# Altium PCB pay-optical.PcbDoc (part 5 of 6)
Units mm, origin at the board's own origin, x right, y up, seen from the top; angles counter-clockwise.
Board outline 128 x 54 mm, 4 copper layers (Top Layer, GND, VCC, Bottom Layer), stack 0.778 mm thick; 459 components, 246 nets, 1364 pads, 496 vias.
Unrouted connection lines stored in the file: 133.
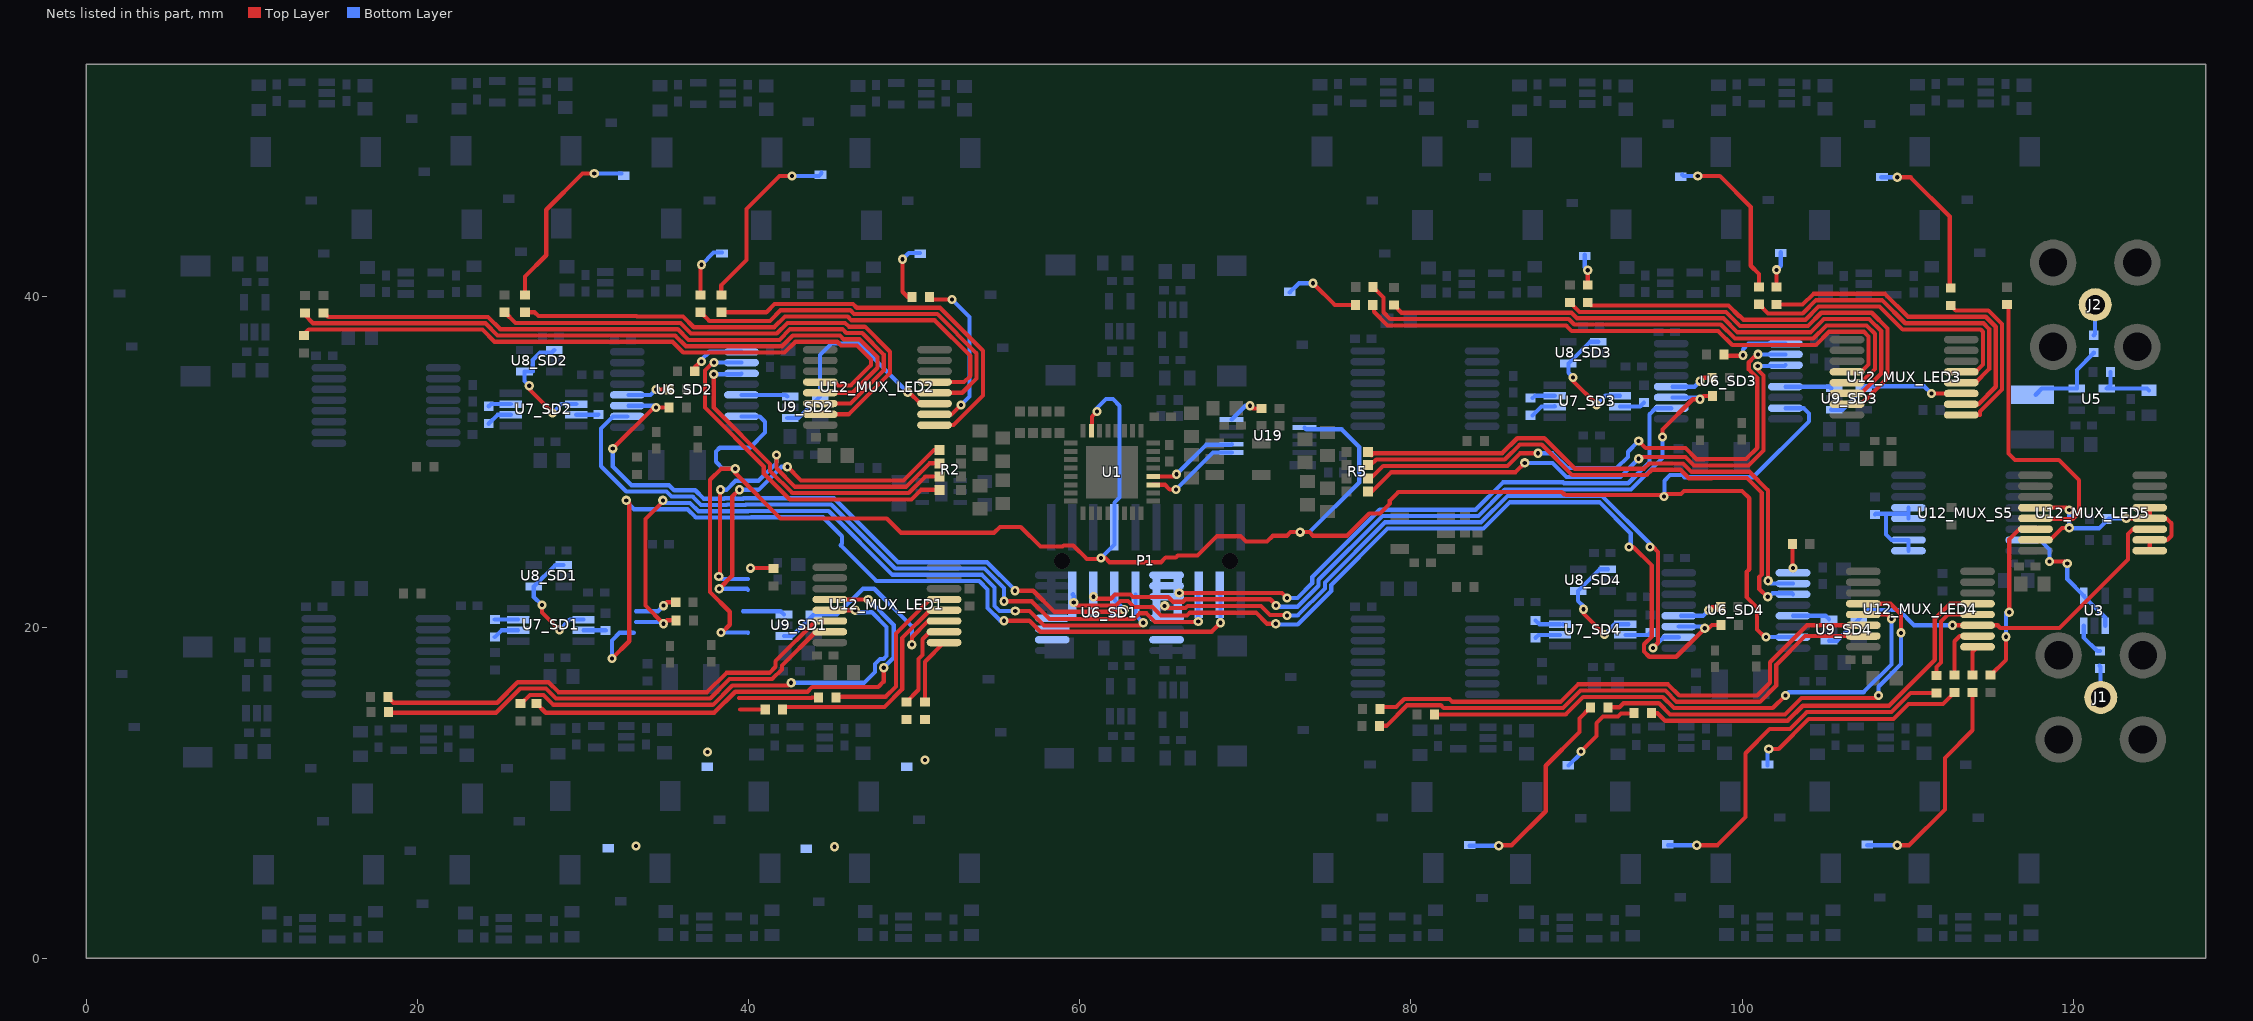
[diagram p6: the nets of this part, all layers, seen from the top]

## Via types
v1: diameter 0.559, hole 0.254, Top Layer to Bottom Layer, 440 vias
v2: diameter 2.362, hole 2.1, Top Layer to Bottom Layer, 34 vias
v3: diameter 1.3, hole 1, Top Layer to Bottom Layer, 14 vias
v4: diameter 6, hole 3.6, Top Layer to Bottom Layer, 8 vias

## Nets (pads, with @x,y where several pads share a name; then routed paths per layer and width w, separated by ;. In a path a pad name is that pad's centre, name@x,y a point inside that pad or via, vN(x,y) a via of type N, cw(c..) or ccw(c..) an arc to the next point about the centre after c; other vN are vias at no path point) (continued)
NetD1_AC43_1: D1_AC43.1 R8_AC43.2 | length 4.7
  Top Layer w0.254: v1(74.085,40.773) 75.404,39.455 R8_AC43.2@76.64,39.455
  Bottom Layer w0.254: D1_AC43.1@72.675,40.209 73.24,40.773 v1(74.085,40.773)
NetD1_AC44_1: D1_AC44.1 R8_AC44.2 | length 12.9
  Top Layer w0.254: v1(85.307,6.797) 85.344,6.834 86.082,6.834 88.138,8.89 88.138,11.633 90.17,13.665 90.17,14.495 R8_AC44.2@90.839,15.164
  Bottom Layer w0.254: D1_AC44.1@83.543,6.797 v1(85.307,6.797)
NetD1_AC51_1: D1_AC51.1 R8_AC51.2
  other v1: 50.648,11.975
NetD1_AC52_1: D1_AC52.1 R8_AC52.2 | length 11.3
  Top Layer w0.254: R8_AC52.2@38.354,40.073 38.354,40.657 39.877,42.18 39.877,45.251 41.875,47.249 v1(42.621,47.249)
  Bottom Layer w0.254: v1(42.621,47.249) 44.247,47.249 44.374,47.376 44.374,47.416 D1_AC52.1@44.399,47.441
NetD1_AC53_1: D1_AC53.1 R8_AC53.2 | length 9.5
  Top Layer w0.254: v1(109.371,47.168) 110.177,47.168 112.535,44.81 112.535,40.543 R8_AC53.2@112.598,40.479
  Bottom Layer w0.254: D1_AC53.1@108.407,47.168 v1(109.371,47.168)
NetD1_AC54_1: D1_AC54.1 R8_AC54.2 | length 13.3
  Top Layer w0.254: v1(109.371,6.834) 110.085,6.834 112.243,8.992 112.243,12.1 113.919,13.776 R8_AC54.2@113.919,16.061
  Bottom Layer w0.254: D1_AC54.1@107.556,6.834 v1(109.371,6.834)
NetD1_AC61_1: D1_AC61.1 R8_AC61.2 | length 4.8
  Top Layer w0.254: 39.421,15.723 43.802,15.723 43.828,15.748 R8_AC61.2@44.23,15.748
  other v1: 33.198,6.782
NetD1_AC62_1: D1_AC62.1 R8_AC62.2 | length 11.1
  Top Layer w0.254: R8_AC62.2@26.492,40.073 26.492,41.18 27.778,42.466 27.778,45.211 29.964,47.396 v1(30.675,47.396)
  Bottom Layer w0.254: v1(30.675,47.396) D1_AC62.1@32.327,47.396
NetD1_AC63_1: D1_AC63.1 R8_AC63.2 | length 1.9
  Top Layer w0.254: R8_AC63.2@90.678,40.657 v1(90.678,41.554)
  Bottom Layer w0.254: D1_AC63.1@90.5,42.494 90.5,41.732 v1(90.678,41.554)
NetD1_AC64_1: D1_AC64.1 R8_AC64.2 | length 5.8
  Top Layer w0.254: v1(90.269,12.497) 91.201,13.429 91.201,14.207 91.599,14.605 92.507,14.605 92.685,14.783 93.455,14.783 R8_AC64.2@93.48,14.808
  Bottom Layer w0.254: D1_AC64.1@89.521,11.643 90.269,12.391 v1(90.269,12.497)
NetD1_AC71_1: D1_AC71.1 R8_AC71.2
  other v1: 45.187,6.743
NetD1_AC72_1: D1_AC72.1 R8_AC72.2 | length 3.9
  Top Layer w0.254: v1(49.295,42.22) 49.295,40.259 49.626,39.929 R8_AC72.2@49.869,39.929
  Bottom Layer w0.254: v1(49.295,42.22) 49.676,42.6 D1_AC72.1@50.356,42.6
NetD1_AC73_1: D1_AC73.1 R8_AC73.2 | length 2.2
  Top Layer w0.254: R8_AC73.2@102.083,40.547 v1(102.083,41.58)
  Bottom Layer w0.254: v1(102.083,41.58) 102.331,41.828 D1_AC73.1@102.331,42.646
NetD1_AC74_1: D1_AC74.1 R8_AC74.2 | length 13.7
  Top Layer w0.254: v1(101.605,12.644) 102.21,12.644 104.018,14.453 109.133,14.453 110.048,15.367 112.133,15.367 R8_AC74.2@112.827,16.061
  Bottom Layer w0.254: D1_AC74.1@101.53,11.657 101.53,12.568 v1(101.605,12.644)
NetD1_AC81_1: D1_AC81.1 R8_AC81.2 | length 1.5
  Top Layer w0.254: 39.497,15.037 R8_AC81.2@41.004,15.037
  other v1: 37.516,12.471
NetD1_AC82_1: D1_AC82.1 R8_AC82.2 | length 3.4
  Top Layer w0.254: R8_AC82.2@37.1,40.073 37.1,41.83 v1(37.154,41.885)
  Bottom Layer w0.254: v1(37.154,41.885) 37.89,42.621 D1_AC82.1@38.393,42.621
NetD1_AC83_1: D1_AC83.1 R8_AC83.2 | length 10
  Top Layer w0.254: v1(97.325,47.243) 98.654,47.243 100.52,45.377 100.52,41.828 101.016,41.332 R8_AC83.2@101.016,40.555
  Bottom Layer w0.254: D1_AC83.1@96.387,47.32 96.463,47.243 v1(97.325,47.243)
NetD1_AC84_1: D1_AC84.1 R8_AC84.2 | length 22.5
  Top Layer w0.254: v1@97.264,6.662 v1(97.264,6.84) 98.508,6.84 100.2,8.531 100.2,12.392 101.663,13.856 102.883,13.856 103.906,14.879 109.021,14.879 110.178,16.036 R8_AC84.2@111.735,16.036
  Bottom Layer w0.254: D1_AC84.1@95.516,6.84 v1(97.264,6.84)
NetJ1_1: J1.1 R36.1 | length 2.3
  Bottom Layer w0.254: J1.1@121.412,16.002 121.648,15.766 121.648,17.611 R36.1@121.59,17.669
NetJ2_1: J2.1 R37.2 | length 1.9
  Bottom Layer w0.254: R37.2@121.234,37.634 121.314,37.714 J2.1@121.314,39.477
NetR2_1: R2.1 U6_SD1.11 | length 22
  Top Layer w0.254: v1(38.227,22.327) 39.014,23.114 39.014,27.889 39.421,28.296 v1(39.446,28.296) ; v1(42.342,29.693) 43.175,28.86 49.358,28.86 51.195,30.697 R2.1@51.522,30.697
  Bottom Layer w0.254: v1(38.227,22.327) 39.906,22.327 39.964,22.268 ; v1(39.446,28.296) 40.589,28.296 41.986,29.693 v1(42.342,29.693)
NetR2_2: R2.2 U6_SD1.10 | length 23.5
  Top Layer w0.254: v1(38.202,23.063) v1@38.278,22.987 ; v1@38.303,22.962 v1@38.278,22.987 ; v1(38.303,28.296) 38.278,28.27 v1@38.278,22.987 ; v1(41.681,30.404) 41.681,29.599 42.801,28.479 49.515,28.479 50.934,29.897 R2.2@51.522,29.897
  Bottom Layer w0.254: v1(38.202,23.063) 38.347,22.918 39.964,22.918 ; v1(38.303,28.296) 38.666,28.296 39.216,28.846 40.6,28.846 41.681,29.927 v1(41.681,30.404)
NetR2_3: R2.3 U6_SD2.11 | length 20.1
  Top Layer w0.254: v1(37.897,35.281) 37.897,33.268 41.3,29.864 41.3,29.441 42.643,28.098 49.673,28.098 50.673,29.097 R2.3@51.522,29.097
  Bottom Layer w0.254: v1(37.897,35.281) 39.524,35.281 U6_SD2.11@39.573,35.33
NetR2_4: R2.4 U6_SD2.10 | length 21.6
  Top Layer w0.254: v1(37.911,35.98) 37.842,35.98 37.363,35.502 37.363,33.263 40.919,29.707 40.919,29.283 42.486,27.717 49.831,27.717 50.412,28.297 R2.4@51.522,28.297
  Bottom Layer w0.254: v1(37.911,35.98) U6_SD2.10@39.573,35.98
NetR5_1: R5.1 U6_SD3.11 | length 33
  Top Layer w0.254: R5.1@77.409,28.188 77.642,28.188 78.816,29.362 86.312,29.362 v1(86.875,29.925) ; v1(93.75,30.175) 93.849,30.274 96.584,30.274 97.095,29.764 97.853,29.764 97.858,29.769 100.389,29.769 101.295,30.676 101.295,35.204 100.937,35.562 v1(100.937,35.778)
  Bottom Layer w0.254: v1(86.875,29.925) 88.55,29.925 89.4,29.075 92.65,29.075 v1(93.75,30.175) ; v1(100.937,35.778) 102.564,35.778 U6_SD3.11@102.614,35.828
NetR5_2: R5.2 U6_SD3.10 | length 34
  Top Layer w0.254: R5.2@77.409,28.988 77.568,28.988 78.324,29.743 85.823,29.743 86.58,30.5 v1(87.675,30.5) ; v1@93.747,31.25 v1(93.75,31.25) 94.175,30.825 96.573,30.825 97.253,30.145 97.695,30.145 97.7,30.15 100.231,30.15 100.914,30.833 100.914,35.047 100.556,35.404 ; 100.556,35.405 100.404,35.557 100.404,35.999 100.717,36.311 100.883,36.311 100.883,36.478 v1(100.951,36.478) v1@100.992,36.478
  Bottom Layer w0.254: v1(87.675,30.5) 88.557,30.5 89.448,29.608 92.421,29.608 93.1,30.287 93.1,30.6 v1(93.75,31.25) ; v1(100.951,36.478) U6_SD3.10@102.614,36.478
NetR5_3: R5.3 U6_SD4.11 | length 34
  Top Layer w0.254: R5.3@77.409,29.788 77.568,29.788 77.905,30.124 85.666,30.124 86.575,31.033 87.896,31.033 89.735,29.194 94.236,29.194 94.554,29.512 96.269,29.512 96.78,29.002 98.168,29.002 98.174,29.007 100.291,29.007 101.189,28.109 101.189,23.183 101.037,23.03 101.037,22.302 101.495,21.844 v1(101.549,21.844) v1@101.549,21.863
  Bottom Layer w0.254: v1@101.538,21.844 v1(101.549,21.844) 101.625,21.844 101.829,22.047 103.013,22.047 U6_SD4.11@103.072,21.988
NetR5_4: R5.4 U6_SD4.10 | length 33.4
  Top Layer w0.254: R5.4@77.409,30.588 77.619,30.378 77.747,30.505 85.508,30.505 86.417,31.414 88.054,31.414 89.893,29.575 94.078,29.575 94.396,29.893 96.427,29.893 96.937,29.383 98.01,29.383 98.016,29.388 100.449,29.388 101.57,28.266 v1(101.57,22.809) v1@101.538,22.809
  Bottom Layer w0.254: v1@101.57,22.754 v1(101.57,22.809) 101.741,22.638 U6_SD4.10@103.072,22.638
NetR8_AC11_1: R8_AC11.1 U12_MUX_LED1.13 | length 29.7
  Top Layer w0.254: R8_AC11.1@26.238,15.384 26.269,15.384 26.798,15.913 27.609,15.913 28.209,15.312 37.842,15.312 39.014,16.485 42.405,16.485 v1(42.57,16.65) ; U12_MUX_LED1.13@44.907,21.025 v1(46.437,21.025)
  Bottom Layer w0.254: v1(42.57,16.65) 46.952,16.65 46.965,16.637 47.63,17.302 47.63,17.777 47.942,18.09 48.158,18.09 48.336,18.268 48.336,20.008 47.435,20.909 46.554,20.909 v1(46.437,21.025)
NetR8_AC12_1: R8_AC12.1 U12_MUX_LED2.13 | length 41
  Top Layer w0.254: R8_AC12.1@13.208,38.972 13.208,38.845 13.699,38.354 24.108,38.354 24.845,37.617 35.566,37.617 36.213,36.97 42.019,36.97 42.666,37.617 45.513,37.617 45.741,37.389 46.705,37.389 47.777,36.316 47.777,35.669 46.266,34.157 U12_MUX_LED2.13@44.332,34.157
NetR8_AC13_1: R8_AC13.1 U12_MUX_LED3.13 | length 36.8
  Top Layer w0.254: R8_AC13.1@77.716,40.538 78.334,39.92 78.334,39.02 78.745,38.608 89.533,38.608 89.863,38.278 98.71,38.278 99.561,37.427 104.292,37.427 105.092,38.227 107.514,38.227 108.018,37.723 108.018,35.599 107.186,34.767 U12_MUX_LED3.13@106.333,34.767
NetR8_AC14_1: R8_AC14.1 U12_MUX_LED4.13 | length 34
  Top Layer w0.254: R8_AC14.1@81.424,14.732 89.343,14.732 90.4,15.79 95.208,15.79 95.885,15.113 101.852,15.113 v1(102.614,15.875) ; U12_MUX_LED4.13@107.315,20.768 108.747,20.768 v1(109.017,20.498)
  Bottom Layer w0.254: v1(102.614,15.875) 102.817,16.078 107.34,16.078 109.017,17.755 v1(109.017,20.498)
NetR8_AC15_1: R8_AC15.1 U12_MUX_LED5.13 | length 18.7
  Top Layer w0.254: R8_AC15.1@116.002,39.48 116.078,39.404 116.078,30.497 116.475,30.1 119.125,30.1 120.345,28.88 120.345,26.911 119.967,26.533 117.75,26.533 U12_MUX_LED5.13@117.712,26.571
NetR8_AC21_1: R8_AC21.1 U12_MUX_LED1.14 | length 29.6
  Top Layer w0.254: R8_AC21.1@18.229,15.773 18.564,15.438 24.82,15.438 26.056,16.675 27.924,16.675 28.521,16.078 37.49,16.078 38.659,17.247 41.267,17.247 41.631,17.61 41.631,17.951 44.055,20.375 U12_MUX_LED1.14@44.907,20.375
NetR8_AC22_1: R8_AC22.1 U12_MUX_LED2.14 | length 41
  Top Layer w0.254: R8_AC22.1@14.326,38.972 14.351,38.997 14.613,38.735 24.266,38.735 25.002,37.998 35.723,37.998 36.371,37.351 41.861,37.351 42.509,37.998 45.671,37.998 45.899,37.77 46.863,37.77 48.158,36.474 48.158,35.511 46.155,33.507 U12_MUX_LED2.14@44.332,33.507
NetR8_AC23_1: R8_AC23.1 U12_MUX_LED3.14 | length 35.9
  Top Layer w0.254: R8_AC23.1@78.969,39.455 79.434,38.989 89.69,38.989 90.021,38.659 98.868,38.659 99.718,37.808 104.135,37.808 104.935,38.608 107.672,38.608 108.399,37.881 108.399,35.33 107.186,34.117 U12_MUX_LED3.14@106.333,34.117
NetR8_AC24_1: R8_AC24.1 U12_MUX_LED4.14 | length 32.7
  Top Layer w0.254: R8_AC24.1@78.122,15.062 78.237,15.177 79.108,15.177 79.598,15.667 82.326,15.667 82.499,15.494 89.027,15.494 90.085,16.552 95.524,16.552 96.201,15.875 100.912,15.875 101.682,16.645 101.682,17.887 103.913,20.118 U12_MUX_LED4.14@107.315,20.118
NetR8_AC25_1: R8_AC25.1 U12_MUX_LED5.14 | length 10.6
  Top Layer w0.254: R8_AC25.1@115.011,17.111 115.931,18.031 v1(115.931,19.426) ; v1(116.125,20.9) 116.125,25.3 116.746,25.921 U12_MUX_LED5.14@117.712,25.921
  Bottom Layer w0.254: v1(115.931,19.426) 115.931,20.869 115.961,20.9 v1(116.125,20.9)
NetR8_AC31_1: R8_AC31.1 U12_MUX_LED1.15 | length 29.3
  Top Layer w0.254: R8_AC31.1@18.254,14.884 18.305,14.834 24.754,14.834 26.214,16.294 27.766,16.294 28.367,15.693 37.684,15.693 38.857,16.866 41.425,16.866 42.012,17.452 42.012,17.682 44.055,19.725 U12_MUX_LED1.15@44.907,19.725
NetR8_AC32_1: R8_AC32.1 U12_MUX_LED2.15 | length 31.3
  Top Layer w0.254: R8_AC32.1@25.273,39.023 25.916,38.379 35.881,38.379 36.529,37.732 41.703,37.732 42.351,38.379 45.828,38.379 46.057,38.151 47.021,38.151 48.539,36.632 48.539,35.353 46.044,32.857 U12_MUX_LED2.15@44.332,32.857
NetR8_AC33_1: R8_AC33.1 U12_MUX_LED3.15 | length 26.6
  Top Layer w0.254: R8_AC33.1@89.611,39.607 90.178,39.04 99.025,39.04 99.876,38.189 103.977,38.189 104.777,38.989 107.83,38.989 108.78,38.039 108.78,35.061 107.186,33.467 U12_MUX_LED3.15@106.333,33.467
NetR8_AC34_1: R8_AC34.1 U12_MUX_LED4.15 | length 32.9
  Top Layer w0.254: R8_AC34.1@78.097,14.046 78.516,14.046 79.756,15.286 81.804,15.286 81.977,15.113 89.185,15.113 90.243,16.171 95.366,16.171 96.043,15.494 101.07,15.494 102.063,16.487 102.063,17.729 103.801,19.468 U12_MUX_LED4.15@107.315,19.468
NetR8_AC41_1: R8_AC41.1 U12_MUX_LED1.12 | length 30.1
  Top Layer w0.254: R8_AC41.1@27.203,15.384 27.754,14.834 37.922,14.834 39.192,16.104 43.561,16.104 43.84,16.383 47.828,16.383 48.158,16.713 48.158,17.551 v1(48.163,17.556) ; U12_MUX_LED1.12@44.907,21.675 v1(47.233,21.675)
  Bottom Layer w0.254: v1(47.233,21.675) 48.768,20.14 48.768,18.161 v1(48.163,17.556)
NetR8_AC42_1: R8_AC42.1 U12_MUX_LED2.12 | length 39.7
  Top Layer w0.254: R8_AC42.1@13.157,37.617 13.157,37.691 13.439,37.973 23.927,37.973 24.664,37.236 35.408,37.236 36.055,36.589 42.177,36.589 42.824,37.236 45.355,37.236 45.584,37.008 46.547,37.008 47.396,36.159 47.396,35.826 46.165,34.595 45.397,34.595 45.184,34.807 U12_MUX_LED2.12@44.332,34.807
NetR8_AC43_1: R8_AC43.1 U12_MUX_LED3.12 | length 34.8
  Top Layer w0.254: R8_AC43.1@77.69,39.455 77.766,39.378 77.766,39.048 78.588,38.227 89.375,38.227 89.705,37.897 98.552,37.897 99.403,37.046 104.45,37.046 105.25,37.846 107.357,37.846 107.637,37.565 107.637,35.868 107.186,35.417 U12_MUX_LED3.12@106.333,35.417
NetR8_AC44_1: R8_AC44.1 U12_MUX_LED4.12 | length 25.2
  Top Layer w0.254: R8_AC44.1@91.889,15.164 92.583,15.164 92.828,15.409 94.971,15.409 95.647,14.732 102.592,14.732 103.582,15.723 108.077,15.723 v1(108.229,15.875) ; U12_MUX_LED4.12@107.315,21.418 108.952,21.418 109.221,21.149 109.235,21.149 109.578,20.805 109.576,20.803 109.601,20.777 v1(109.601,19.66)
  Bottom Layer w0.254: v1(108.229,15.875) 108.229,16.408 109.601,17.78 v1(109.601,19.66)
NetR8_AC51_1: R8_AC51.1 U12_MUX_LED1.1 | length 4.1
  Top Layer w0.254: R8_AC51.1@50.648,15.486 50.648,17.916 U12_MUX_LED1.1@51.807,19.075
NetR8_AC52_1: R8_AC52.1 U12_MUX_LED2.1 | length 23.5
  Top Layer w0.254: R8_AC52.1@38.354,39.023 41.072,39.023 41.571,39.522 46.302,39.522 46.53,39.294 51.556,39.294 54.153,36.697 54.153,33.993 52.367,32.207 U12_MUX_LED2.1@51.232,32.207
NetR8_AC53_1: R8_AC53.1 U12_MUX_LED3.1 | length 10.7
  Top Layer w0.254: R8_AC53.1@112.598,39.429 112.895,39.133 114.867,39.133 115.697,38.302 115.697,34.361 114.369,33.032 114.369,32.817 U12_MUX_LED3.1@113.233,32.817
NetR8_AC54_1: R8_AC54.1 U12_MUX_LED4.1 | length 1.8
  Top Layer w0.254: R8_AC54.1@113.919,17.111 113.919,18.522 U12_MUX_LED4.1@114.215,18.818
NetR8_AC61_1: R8_AC61.1 U12_MUX_LED1.5 | length 10.9
  Top Layer w0.254: R8_AC61.1@45.28,15.748 45.331,15.799 48.28,15.799 48.895,16.414 48.895,19.616 50.955,21.675 U12_MUX_LED1.5@51.807,21.675
NetR8_AC62_1: R8_AC62.1 U12_MUX_LED2.5 | length 32
  Top Layer w0.254: R8_AC62.1@26.492,39.023 27.076,39.023 27.313,38.786 33.232,38.786 33.257,38.76 36.039,38.76 36.686,38.113 41.546,38.113 42.193,38.76 45.986,38.76 46.215,38.532 51.24,38.532 53.391,36.381 53.391,35.182 53.016,34.807 U12_MUX_LED2.5@51.232,34.807
NetR8_AC63_1: R8_AC63.1 U12_MUX_LED3.5 | length 28.7
  Top Layer w0.254: R8_AC63.1@90.678,39.607 90.864,39.421 99.183,39.421 99.823,38.782 99.877,38.782 100.089,38.57 103.819,38.57 104.619,39.37 108.296,39.37 109.693,37.973 114.41,37.973 114.537,37.846 114.537,35.868 114.086,35.417 U12_MUX_LED3.5@113.233,35.417
NetR8_AC64_1: R8_AC64.1 U12_MUX_LED4.5 | length 24.2
  Top Layer w0.254: R8_AC64.1@94.53,14.808 94.894,14.808 95.352,14.351 102.749,14.351 103.658,15.26 108.863,15.26 111.633,18.03 111.633,20.498 112.553,21.418 U12_MUX_LED4.5@114.215,21.418
NetR8_AC71_1: R8_AC71.1 U12_MUX_LED1.2 | length 5.7
  Top Layer w0.254: R8_AC71.1@49.53,15.486 50.267,16.222 50.267,18.085 50.503,18.321 50.503,19.274 50.955,19.725 U12_MUX_LED1.2@51.807,19.725
NetR8_AC72_1: R8_AC72.1 U12_MUX_LED2.2 | length 10.3
  Top Layer w0.254: R8_AC72.1@50.919,39.929 51.05,39.797 v1(52.278,39.797) ; U12_MUX_LED2.2@51.232,32.857 52.263,32.857 v1(52.832,33.426)
  Bottom Layer w0.254: v1(52.278,39.797) 53.34,38.735 53.34,33.934 v1(52.832,33.426)
NetR8_AC73_1: R8_AC73.1 U12_MUX_LED3.2 | length 20.5
  Top Layer w0.254: R8_AC73.1@102.083,39.497 102.1,39.48 103.651,39.48 104.303,40.132 108.636,40.132 110.016,38.752 114.709,38.752 115.316,38.145 115.316,34.519 114.264,33.467 U12_MUX_LED3.2@113.233,33.467
NetR8_AC74_1: R8_AC74.1 U12_MUX_LED4.2 | length 3.6
  Top Layer w0.254: R8_AC74.1@112.827,17.111 112.827,19.152 113.143,19.468 U12_MUX_LED4.2@114.215,19.468
NetR8_AC81_1: R8_AC81.1 U12_MUX_LED1.4 | length 14
  Top Layer w0.254: R8_AC81.1@42.054,15.037 42.206,15.189 48.209,15.189 49.276,16.256 49.276,19.347 50.955,21.025 U12_MUX_LED1.4@51.807,21.025
NetR8_AC82_1: R8_AC82.1 U12_MUX_LED2.4 | length 22.7
  Top Layer w0.254: R8_AC82.1@37.1,39.023 37.629,38.494 41.288,38.494 41.935,39.141 46.144,39.141 46.373,38.913 51.398,38.913 53.772,36.539 53.772,35.024 52.905,34.157 U12_MUX_LED2.4@51.232,34.157
NetR8_AC83_1: R8_AC83.1 U12_MUX_LED3.4 | length 19.6
  Top Layer w0.254: R8_AC83.1@101.016,39.505 101.57,38.951 103.661,38.951 104.461,39.751 108.454,39.751 109.851,38.354 114.568,38.354 114.918,38.004 114.918,35.599 114.086,34.767 U12_MUX_LED3.4@113.233,34.767
NetR8_AC84_1: R8_AC84.1 U12_MUX_LED4.4 | length 5.7
  Top Layer w0.254: R8_AC84.1@111.735,17.086 111.735,17.593 112.014,17.872 112.014,20.34 112.442,20.768 U12_MUX_LED4.4@114.215,20.768
NetR9_SD1_1: R9_SD1.1 U7_SD1.3 | length 1.4
  Bottom Layer w0.254: R9_SD1.1@24.676,20.464 26.082,20.464 U7_SD1.3@26.084,20.462
NetR9_SD1_2: R9_SD1.2 U7_SD1.2 | length 1.6
  Bottom Layer w0.254: R9_SD1.2@24.676,19.414 25.074,19.812 U7_SD1.2@26.084,19.812
NetR9_SD2_1: R9_SD2.1 U7_SD2.3 | length 1.4
  Bottom Layer w0.254: R9_SD2.1@24.308,33.342 24.443,33.477 U7_SD2.3@25.637,33.477
NetR9_SD2_2: R9_SD2.2 U7_SD2.2 | length 1.6
  Bottom Layer w0.254: R9_SD2.2@24.308,32.292 24.843,32.827 U7_SD2.2@25.637,32.827 U7_SD2.2@25.622,32.842
NetR9_SD3_1: R9_SD3.1 U7_SD3.3 | length 1.4
  Bottom Layer w0.254: R9_SD3.1@87.348,33.839 87.483,33.974 U7_SD3.3@88.678,33.974
NetR9_SD3_2: R9_SD3.2 U7_SD3.2 | length 1.6
  Bottom Layer w0.254: R9_SD3.2@87.348,32.789 87.883,33.324 U7_SD3.2@88.678,33.324 U7_SD3.2@88.662,33.34
NetR9_SD4_1: R9_SD4.1 U7_SD4.3 | length 1.6
  Bottom Layer w0.254: R9_SD4.1@87.528,20.413 87.759,20.183 U7_SD4.3@89.002,20.183 ; U7_SD4.3@89.19,20.185 U7_SD4.3@89.192,20.183
NetR9_SD4_2: R9_SD4.2 U7_SD4.2 | length 1.5
  Bottom Layer w0.254: R9_SD4.2@87.528,19.363 87.698,19.533 U7_SD4.2@89.002,19.533
NetR11_2: R11.2 U12_MUX_S5.1 U12_MUX_S5.2 U12_MUX_S5.4 U12_MUX_S5.5 | length 6.1
  Bottom Layer w0.254: R11.2@108.026,26.805 108.069,26.848 108.687,26.848 ; U12_MUX_S5.1@110.042,24.616 U12_MUX_S5.2@110.042,25.266 109.023,25.266 108.687,25.603 108.687,26.848 ; U12_MUX_S5.4@110.042,26.566 110.042,26.848 ; U12_MUX_S5.5@110.042,27.216 110.042,26.848 ; 108.687,26.848 110.042,26.848
NetR12_2: R12.2 U12_MUX_LED5.1 U12_MUX_LED5.2 U12_MUX_LED5.4 U12_MUX_LED5.5 U12_MUX_LED5.12 U12_MUX_LED5.15 | length 15.3
  Top Layer w0.254: U12_MUX_LED5.15@117.712,25.271 118.596,25.271 119.325,26 v1(119.75,26) ; U12_MUX_LED5.12@117.712,27.221 117.796,27.137 U12_MUX_LED5.12@117.812,27.153 ; U12_MUX_LED5.12@118.089,27.225 119.607,27.225 v1(119.756,27.076) ; v1(123.196,26.571) U12_MUX_LED5.4@124.612,26.571 ; U12_MUX_LED5.1@124.612,24.621 U12_MUX_LED5.2@124.612,25.271 125.671,25.271 125.925,25.525 125.925,26.275 125.629,26.571 U12_MUX_LED5.4@124.612,26.571 ; U12_MUX_LED5.5@124.612,27.221 U12_MUX_LED5.4@124.612,26.571
  Bottom Layer w0.254: v1(119.756,27.076) 119.756,26.006 v1(119.75,26) 119.779,25.971 121.546,25.971 122.146,26.571 v1(123.196,26.571)
NetR13_2: R13.2 R35.1 U5.4 | length 3.7
  Bottom Layer w0.254: R35.1@122.242,35.411 122.242,34.631 U5.4@122.018,34.408 124.457,34.408 R13.2@124.562,34.303
NetR16_SD1_1: R16_SD1.1 U7_SD1.7 | length 1.3
  Bottom Layer w0.254: U7_SD1.7@30.034,19.812 31.352,19.812 R16_SD1.1@31.369,19.795
NetR16_SD2_1: R16_SD2.1 U7_SD2.7 | length 1.4
  Bottom Layer w0.254: U7_SD2.7@29.587,32.827 30.908,32.827 R16_SD2.1@30.933,32.852
NetR16_SD3_1: R16_SD3.1 U7_SD3.7 | length 1.6
  Bottom Layer w0.254: U7_SD3.7@92.628,33.324 93.844,33.324 R16_SD3.1@94.082,33.562
NetR16_SD4_1: R16_SD4.1 U7_SD4.7 | length 1.6
  Bottom Layer w0.254: U7_SD4.7@92.952,19.533 94.306,19.533 R16_SD4.1@94.46,19.687
NetR17_SD1_1: R17_SD1.1 U6_SD1.9 | length 1.6
  Top Layer w0.254: v1(40.111,23.568) 41.473,23.568 R17_SD1.1@41.504,23.537
  Bottom Layer w0.254: v1@39.964,23.568 v1(40.111,23.568)
NetR17_SD2_1: R17_SD2.1 U6_SD2.9 | length 3.3
  Top Layer w0.254: R17_SD2.1@36.771,35.65 36.771,35.724 37.125,36.079 v1(37.152,36.052)
  Bottom Layer w0.254: v1(37.152,36.052) 37.152,36.159 37.624,36.63 U6_SD2.9@39.573,36.63
NetR17_SD3_1: R17_SD3.1 U6_SD3.9 | length 4.1
  Top Layer w0.254: R17_SD3.1@99.1,36.426 99.131,36.395 100.055,36.395 v1(100.055,36.427)
  Bottom Layer w0.254: v1(100.055,36.427) 100.055,36.79 100.393,37.128 U6_SD3.9@102.614,37.128
NetR17_SD4_1: R17_SD4.1 U6_SD4.9 | length 1.5
  Top Layer w0.254: R17_SD4.1@103.034,25.025 103.034,23.616 v1(103.075,23.575)
NetR18_SD1_1: R18_SD1.1 U6_SD1.4 | length 2.6
  Top Layer w0.254: v1(34.869,21.304) 35.073,21.507 R18_SD1.1@35.6,21.507
  Bottom Layer w0.254: 33.202,20.968 34.533,20.968 v1(34.869,21.304)
NetR18_SD2_1: R18_SD2.1 U6_SD2.4 | length 2.6
  Top Layer w0.254: v1(34.413,34.363) R18_SD2.1@35.2,34.363
  Bottom Layer w0.254: U6_SD2.4@32.746,34.027 34.077,34.027 v1(34.413,34.363)
NetR18_SD3_1: R18_SD3.1 U6_SD3.4 | length 2.6
  Top Layer w0.254: v1(97.454,34.861) 97.657,35.064 R18_SD3.1@98.185,35.064
  Bottom Layer w0.254: U6_SD3.4@95.786,34.525 97.118,34.525 v1(97.454,34.861)
NetR18_SD4_1: R18_SD4.1 U6_SD4.4 | length 2.6
  Top Layer w0.254: v1(97.977,21.024) 98.18,21.228 R18_SD4.1@98.708,21.228
  Bottom Layer w0.254: U6_SD4.4@96.31,20.688 97.641,20.688 v1(97.977,21.024)
NetR36_2: R36.2 U3.3 | length 2
  Bottom Layer w0.254: U3.3@120.625,20.089 120.625,19.38 121.446,18.559 R36.2@121.615,18.559
NetR37_1: R37.1 R38.2 U5.3 | length 5.2
  Bottom Layer w0.254: R38.2@117.729,34.04 118.097,34.408 U5.3@120.218,34.408 120.218,35.535 121.234,36.551 R37.1@121.234,36.584
NetR47_1: R47.1 U19.5 | length 2.2
  Top Layer w0.254: v1(70.288,33.37) 70.443,33.215 R47.1@70.985,33.215
  Bottom Layer w0.254: U19.5@69.176,32.55 69.996,33.37 v1(70.288,33.37)
NetU1_19: U1.19 U19.1 | length 5.9
  Top Layer w0.254: U1.19@64.44,28.6 65.151,28.6 65.43,28.321 v1(65.811,28.321) v1@65.909,28.321
  Bottom Layer w0.254: v1(65.811,28.321) 68.04,30.55 U19.1@69.176,30.55
NetU1_20: U1.20 U19.2 | length 5.6
  Top Layer w0.254: U1.20@64.44,29.108 65.823,29.108 65.837,29.123 v1(65.837,29.235)
  Bottom Layer w0.254: v1(65.837,29.235) 67.615,31.013 69.139,31.013 U19.2@69.176,31.05
NetU3_1: U3.1 U3.4 U12_MUX_S5.15 | length 8.4
  Top Layer w0.254: v1(118.556,23.976) 119.506,23.976 v1(119.631,23.851)
  Bottom Layer w0.254: U12_MUX_S5.15@116.942,25.266 117.99,25.266 118.556,24.7 v1(118.556,23.976) ; v1(119.631,23.851) 119.631,22.914 120.625,21.92 U3.4@120.625,21.889 121.925,20.589 U3.1@121.925,20.089
NetU6_SD1_13: U6_SD1.13 U9_SD1.3 | length 2.6
  Bottom Layer w0.254: 39.66,20.968 41.938,20.968 U9_SD1.3@42.139,20.767
NetU6_SD2_13: U6_SD2.13 U9_SD2.3 | length 2.8
  Bottom Layer w0.254: U6_SD2.13@39.573,34.03 42.249,34.03 U9_SD2.3@42.341,33.937
NetU6_SD3_13: U6_SD3.13 U9_SD3.3 | length 2.8
  Bottom Layer w0.254: U6_SD3.13@102.614,34.528 105.289,34.528 U9_SD3.3@105.382,34.435
NetU6_SD4_13: U6_SD4.13 U9_SD4.3 | length 2.3
  Bottom Layer w0.254: U6_SD4.13@103.072,20.688 105.045,20.688 U9_SD4.3@105.246,20.487
NetU7_SD1_6: U7_SD1.6 U8_SD1.1 U8_SD1.4 | length 7.3
  Top Layer w0.254: v1(27.523,21.336) 27.523,20.893 v1(28.575,19.842)
  Bottom Layer w0.254: v1(27.523,21.336) 27.029,21.83 U8_SD1.4@27.029,22.464 28.329,23.764 U8_SD1.1@28.829,23.764 ; v1(28.575,19.842) 29.195,20.462 U7_SD1.6@30.034,20.462
NetU7_SD2_6: U7_SD2.6 U8_SD2.1 U8_SD2.4 | length 7.6
  Top Layer w0.254: v1(26.75,34.583) 26.75,34.381 28.161,32.97 v1(28.161,32.944)
  Bottom Layer w0.254: v1(26.75,34.583) 26.466,34.867 U8_SD2.4@26.466,35.437 26.966,35.437 26.966,36.142 27.4,36.576 28.105,36.576 U8_SD2.1@28.266,36.737 ; v1(28.161,32.944) 28.693,33.477 U7_SD2.6@29.587,33.477
NetU7_SD3_6: U7_SD3.6 U8_SD3.1 U8_SD3.4 | length 7.2
  Top Layer w0.254: v1(89.791,35.081) 89.791,34.878 91.201,33.468 v1(91.201,33.441)
  Bottom Layer w0.254: v1(89.791,35.081) 89.507,35.365 U8_SD3.4@89.507,35.934 90.807,37.234 U8_SD3.1@91.307,37.234 ; v1(91.201,33.441) 91.734,33.974 U7_SD3.6@92.628,33.974
NetU7_SD4_6: U7_SD4.6 U8_SD4.1 U8_SD4.4 | length 7.3
  Top Layer w0.254: v1(90.424,21.082) 90.424,20.821 v1(91.683,19.562)
  Bottom Layer w0.254: v1(90.424,21.082) 90.424,21.264 90.094,21.594 U8_SD4.4@90.094,22.195 91.394,23.495 U8_SD4.1@91.894,23.495 ; v1(91.683,19.562) 92.303,20.183 U7_SD4.6@93.142,20.183
NetU9_SD1_1: U9_SD1.1 U9_SD1.4 U12_MUX_LED1.3 | length 13.8
  Top Layer w0.254: v1(49.86,18.948) 49.86,19.392 50.844,20.375 U12_MUX_LED1.3@51.807,20.375
  Bottom Layer w0.254: U9_SD1.1@42.139,19.467 42.639,19.467 U9_SD1.4@43.939,20.767 45.345,20.767 46.905,22.327 47.587,22.327 49.86,20.054 v1(49.86,18.948)
NetU9_SD2_1: U9_SD2.1 U9_SD2.4 U12_MUX_LED2.3 | length 14
  Top Layer w0.254: v1(49.606,34.188) 49.698,34.188 50.384,33.503 51.227,33.503 U12_MUX_LED2.3@51.232,33.507
  Bottom Layer w0.254: U9_SD2.1@42.341,32.637 U9_SD2.1@42.841,32.637 ; U9_SD2.1@42.516,32.638 43.016,32.638 U9_SD2.4@44.316,33.938 44.316,36.439 45.004,37.128 46.667,37.128 v1(49.606,34.188)
NetU9_SD3_1: U9_SD3.1 U9_SD3.4 U12_MUX_LED3.3 | length 8.9
  Top Layer w0.254: v1(111.43,34.112) 113.229,34.112 U12_MUX_LED3.3@113.233,34.117
  Bottom Layer w0.254: U9_SD3.1@105.382,33.135 U9_SD3.1@105.882,33.135 ; U9_SD3.1@105.556,33.136 106.056,33.136 U9_SD3.4@107.356,34.436 107.471,34.55 110.992,34.55 v1(111.43,34.112)
NetU9_SD4_1: U9_SD4.1 U9_SD4.4 U12_MUX_LED4.3 U12_MUX_LED5.3 | length 23.9
  Top Layer w0.254: v1(112.701,20.118) U12_MUX_LED4.3@114.215,20.118 115.432,20.118 115.589,19.961 119.173,19.961 123.308,24.096 123.308,25.625 123.604,25.921 U12_MUX_LED5.3@124.612,25.921
  Bottom Layer w0.254: U9_SD4.1@105.246,19.187 105.746,19.187 U9_SD4.4@107.046,20.487 107.59,21.031 109.472,21.031 110.385,20.118 v1(112.701,20.118)
SCK: P1.8 U1.31 U6_SD1.15 U6_SD2.15 U6_SD3.15 U6_SD4.15 U19.7 | length 135.5
  Top Layer w0.254: v1(38.329,19.685) 38.397,19.685 38.862,20.15 38.862,20.937 37.668,22.131 37.668,28.904 38.33,29.566 v1(39.192,29.566) 39.192,29.312 41.935,26.568 48.343,26.568 49.206,25.705 54.82,25.705 55.176,26.06 56.436,26.06 57.629,24.867 58.957,24.867 59.033,24.943 59.605,24.943 60.427,24.122 61.218,24.122 v1(61.277,24.181) 61.548,24.181 61.802,23.927 64.908,23.927 65.188,24.207 65.796,24.207 65.922,24.333 67.114,24.333 68.279,25.499 69.701,25.499 70.032,25.168 71.301,25.168 71.658,25.525 72.517,25.525 72.733,25.742 v1(73.308,25.742) 73.865,25.742 74.082,25.525 76.133,25.525 77.479,26.872 78.13,26.872 78.725,27.467 78.725,27.655 79.239,28.169 89.107,28.169 89.251,28.025 89.277,28.051 89.347,27.981 95.203,27.981 v1(95.288,27.896) 95.443,28.051 96.309,28.051 96.49,28.232 99.988,28.232 100.427,27.793 100.427,23.498 100.275,23.346 100.275,21.821 100.903,21.193 100.903,19.87 101.368,19.406 v1(101.436,19.406) ; U1.31@60.706,31.852 60.731,31.877 60.731,32.715 v1(61.036,33.02)
  Bottom Layer w0.254: v1(38.329,19.685) 39.947,19.685 39.964,19.668 ; v1(39.192,29.566) 38.462,29.566 38.033,29.994 38.033,30.609 38.259,30.836 40.076,30.836 40.996,31.755 40.996,32.41 40.676,32.73 U6_SD2.15@39.573,32.73 ; v1(61.036,33.02) 61.036,33.235 61.583,33.782 62.001,33.782 62.408,33.376 62.408,27.834 62.095,27.521 P1.8@62.095,26.032 62.095,24.998 v1(61.277,24.181) ; v1(73.308,25.742) 73.88,25.742 76.881,28.742 76.881,30.89 75.817,31.954 73.672,31.954 U19.7@73.576,32.05 ; v1(95.288,27.896) 95.308,27.917 95.308,28.848 95.645,29.185 96.395,29.185 96.523,29.056 100.659,29.056 104.036,32.434 104.036,32.908 103.716,33.228 U6_SD3.15@102.614,33.228 ; v1(101.436,19.406) 103.055,19.406 U6_SD4.15@103.072,19.388
SD1_C\S\_1: P1.9 R15_SD1.1 U6_SD1.3 | length 45.7
  Top Layer w0.254: v1(34.823,27.661) 34.823,27.584 33.782,26.543 33.782,23.697 33.769,23.684 33.769,21.312 v1(34.869,20.212) 35.073,20.415 R15_SD1.1@35.614,20.415 ; v1(56.109,20.98) 56.972,20.98 57.842,20.111 63.672,20.111 v1(63.83,20.269)
  Bottom Layer w0.254: 33.202,20.318 34.763,20.318 v1(34.869,20.212) ; v1(34.823,27.661) 34.976,27.508 36.465,27.508 36.973,27 38.84,27 38.865,27.026 38.884,27.026 38.91,27 39.983,27 40.008,27.026 44.838,27.026 48.699,23.165 54.091,23.165 54.858,22.398 54.858,21.274 55.152,20.98 v1(56.109,20.98) ; P1.9@63.365,21.968 63.365,20.734 v1(63.83,20.269)
SD2_C\S\_1: P1.7 R15_SD2.1 U6_SD2.3 | length 43.2
  Top Layer w0.254: v1(31.801,30.785) 34.287,33.271 v1(34.413,33.271) 34.955,33.271 34.959,33.275 R15_SD2.1@35.198,33.275 ; v1@56.203,22.325 v1(56.083,22.206) 57.194,22.206 58.471,20.93 62.56,20.93 v1(62.687,21.057)
  Bottom Layer w0.254: v1(31.801,30.785) 31.801,29.713 32.938,28.575 35.202,28.575 35.507,28.27 36.78,28.27 37.288,27.762 38.524,27.762 38.55,27.788 39.2,27.788 39.225,27.762 39.667,27.762 39.693,27.788 45.154,27.788 49.015,23.927 54.407,23.927 56.058,22.276 56.083,22.301 v1(56.083,22.206) ; U6_SD2.3@32.746,33.377 34.307,33.377 v1(34.413,33.271) ; P1.7@62.095,21.968 62.095,21.649 v1(62.687,21.057)
SD3_C\S\_1: P1.5 R15_SD3.1 U6_SD3.3 | length 46.3
  Top Layer w0.254: v1(60.833,21.844) 60.96,21.717 61.874,21.717 62.125,21.968 62.305,21.968 62.308,21.971 63.066,21.971 63.214,21.823 65.347,21.823 65.63,21.539 66.229,21.539 66.381,21.692 71.501,21.692 71.857,21.336 v1(71.857,21.312) ; v1(95.196,31.494) 95.196,31.946 97.018,33.768 v1(97.454,33.768) 97.657,33.972 R15_SD3.1@98.199,33.972
  Bottom Layer w0.254: P1.5@60.825,21.968 60.833,21.96 v1(60.833,21.844) ; v1(71.857,21.312) 71.934,21.234 73.153,21.234 74.422,22.504 74.422,22.867 78.274,26.719 84.072,26.719 85.666,28.313 93.281,28.313 95.196,30.228 v1(95.196,31.494) ; U6_SD3.3@95.786,33.875 97.348,33.875 v1(97.454,33.768)
SD4_C\S\_1: P1.3 R15_SD4.1 U6_SD4.3 | length 54.5
  Top Layer w0.254: v1(59.639,21.488) 59.817,21.311 62.187,21.311 62.466,21.59 62.908,21.59 63.221,21.278 63.221,21.22 64.386,21.22 64.905,20.701 66.468,20.701 66.646,20.879 70.637,20.879 71.305,20.212 v1(71.838,20.212) ; v1(93.175,24.85) 93.425,24.85 94.546,23.729 94.546,19.436 94.082,18.971 94.082,18.529 94.394,18.216 96.023,18.216 v1(97.739,19.932) 97.977,19.932 98.18,20.135 R15_SD4.1@98.722,20.135
  Bottom Layer w0.254: P1.3@59.588,22.001 P1.3@59.555,21.968 59.639,21.884 v1(59.639,21.488) ; v1(71.838,20.212) 71.882,20.168 73.164,20.168 75.184,22.188 75.184,22.551 78.59,25.957 84.388,25.957 85.982,27.551 91.384,27.551 93.275,25.66 v1@93.275,24.85 ; v1(93.175,24.85) v1@93.219,24.85 ; U6_SD4.3@96.172,20.038 97.633,20.038 v1(97.739,19.932)
SYNCO1_1: P1.17 U6_SD1.2 | length 55
  Top Layer w0.254: v1(31.75,18.11) 32.791,19.152 32.791,27.486 v1(32.616,27.661) ; v1(55.423,20.396) 56.952,20.396 57.618,19.73 67.965,19.73 v1(68.504,20.269)
  Bottom Layer w0.254: v1(31.75,18.11) 31.75,19.206 32.212,19.668 33.064,19.668 ; v1(32.616,27.661) 32.616,27.587 33.076,27.127 36.307,27.127 36.815,26.619 40.141,26.619 40.166,26.645 44.493,26.645 45.644,25.494 45.644,25.052 45.546,24.954 47.716,22.784 53.933,22.784 54.432,22.285 54.432,21.161 55.197,20.396 v1(55.423,20.396) ; P1.17@68.445,21.968 68.504,21.909 v1(68.504,20.269)
SYNCO2_1: P1.15 U6_SD2.2 | length 46.6
  Top Layer w0.254: v1(55.423,21.565) 57.099,21.565 58.172,20.492 63.266,20.492 63.612,20.839 64.023,20.839 64.541,20.32 67.132,20.32 v1(67.158,20.345)
  Bottom Layer w0.254: U6_SD2.2@32.673,32.73 31.821,32.73 31.09,31.999 31.09,29.718 32.614,28.194 35.044,28.194 35.349,27.889 36.622,27.889 37.13,27.381 38.682,27.381 38.707,27.407 39.042,27.407 39.067,27.381 39.825,27.381 39.85,27.407 44.996,27.407 48.857,23.546 54.249,23.546 55.423,22.372 v1(55.423,21.565) ; v1(67.158,20.345) 67.158,21.9 67.132,21.925 P1.15@67.175,21.968
SYNCO3_1: P1.13 U6_SD3.2 | length 36.7
  Top Layer w0.254: v1(66.008,22.073) 72.212,22.073 v1(72.517,21.768)
  Bottom Layer w0.254: P1.13@65.905,21.968 65.888,21.985 65.989,22.087 66.004,22.073 v1(66.008,22.073) ; v1(72.517,21.768) 73.147,21.768 74.041,22.661 74.041,23.025 78.116,27.1 83.915,27.1 85.565,28.75 89.186,28.75 89.242,28.694 93.124,28.694 94.41,29.98 94.41,32.856 94.781,33.228 U6_SD3.2@95.714,33.228
SYNCO4_1: P1.11 U6_SD4.2 | length 42.7
  Top Layer w0.254: v1(65.126,21.289) 65.257,21.158 66.387,21.158 66.518,21.289 70.943,21.289 71.496,20.737 71.609,20.737 71.617,20.745 72.509,20.745 72.517,20.737 v1(72.517,20.701) ; v1(94.433,24.844) 94.629,24.844 94.927,24.546 94.927,19.062 v1(94.615,18.75)
  Bottom Layer w0.254: v1(72.517,20.701) 73.158,20.701 74.803,22.346 74.803,22.709 78.432,26.338 84.23,26.338 85.824,27.932 91.541,27.932 94.433,25.041 v1(94.433,24.844) ; v1(94.615,18.75) 95.254,19.388 U6_SD4.2@96.172,19.388
pads on no net: P1.21 P1.22 U1.15 U1.16 U1.26 U1.29 U1.30 U10.2 U10.5
copper on no net: | length 282
  Top Layer w0.254: 5.08,10.338 10.643,10.338 13.487,13.183 14.737,13.183 16.439,14.884 ; 12.522,13.564 14.58,13.564 16.789,15.773 ; 21.254,6.627 21.369,6.742 22.149,6.742 24.13,8.723 24.13,11.506 26.238,13.614 26.238,14.334 ; 26.314,12.141 27.203,13.03 27.203,14.334 ; 33.198,6.782 33.884,6.782 36.246,9.144 36.246,12.548 39.421,15.723 ; 37.516,12.471 37.516,13.056 39.497,15.037 ; 45.187,6.743 46.012,6.743 48.26,8.992 48.26,11.582 49.53,12.852 49.53,14.436 ; 50.648,11.975 50.648,14.436
  Bottom Layer w0.254: 10.139,1.347 11.054,1.347 12.09,1.347 12.171,1.265 12.171,1.24 12.764,0.647 14.672,0.647 15.165,1.14 ; 10.489,11.326 10.75,11.587 10.75,12.502 10.75,13.538 10.831,13.619 10.856,13.619 11.449,14.212 ; 11.83,15.52 15.804,11.546 15.804,8.653 15.952,8.504 16.091,8.504 18.232,6.363 18.232,1.891 17.66,1.32 17.478,1.32 16.392,1.32 16.082,1.629 14.485,1.629 13.996,1.14 13.365,1.14 ; 12.211,15.677 14.192,13.696 16.558,13.696 17.644,13.696 17.953,13.386 19.55,13.386 20.039,13.875 ; 12.522,13.564 12.522,11.862 12.953,11.431 13.55,11.431 ; 12.63,8.331 14.3,8.331 ; 19.558,6.45 21.077,6.45 21.254,6.627 ; 20.308,2.508 20.308,3.3 ; 21.271,14.368 21.864,13.776 21.864,13.751 21.946,13.669 22.982,13.669 23.897,13.669 24.158,13.408 ; 21.74,1.608 22.001,1.347 22.916,1.347 23.951,1.347 24.033,1.265 24.033,1.24 24.626,0.647 26.534,0.647 27.027,1.14 ; 24.492,8.331 26.162,8.331 ; 25.227,1.14 25.858,1.14 26.347,1.629 27.944,1.629 28.254,1.32 29.339,1.32 29.522,1.32 30.094,1.891 30.094,6.363 27.711,8.745 27.711,11.887 25.369,14.23 ; 25.412,11.431 26.122,12.141 26.314,12.141 ; 29.588,13.851 29.897,13.541 31.494,13.541 31.983,14.03 ; 31.502,6.605 31.527,6.605 33.021,6.605 33.198,6.782 ; 32.277,2.677 32.277,3.455 ; 34.085,1.439 35,1.439 36.036,1.439 36.118,1.358 36.118,1.333 36.71,0.74 38.618,0.74 39.111,1.233 ; 35.841,13.824 36.102,13.563 ; 36.577,8.424 38.246,8.424 ; 37.034,14.605 39.614,12.025 39.614,8.891 39.885,8.62 40.14,8.62 42.178,6.582 42.178,1.984 41.606,1.412 41.424,1.412 40.338,1.412 40.028,1.722 38.431,1.722 37.942,1.233 37.311,1.233 ; 37.496,11.524 37.496,12.452 37.516,12.471 ; 41.576,13.812 41.886,13.503 43.483,13.503 43.972,13.992 ; 43.491,6.566 45.009,6.566 45.187,6.743 ; 44.241,2.47 44.241,3.416 44.241,3.466 ; 45.797,13.867 45.879,13.785 46.914,13.785 47.829,13.785 48.09,13.524 ; 45.87,1.7 46.131,1.439 47.046,1.439 48.081,1.439 48.163,1.358 48.163,1.333 48.756,0.74 50.664,0.74 51.157,1.233 ; 48.613,14.986 51.65,11.949 51.65,9.524 54.224,6.95 54.224,1.984 53.652,1.412 53.469,1.412 52.384,1.412 52.074,1.722 50.477,1.722 49.988,1.233 49.357,1.233 ; 48.622,8.424 50.292,8.424 ; 49.542,11.524 50.196,11.524 50.648,11.975
  Bottom Layer w0.75: 10.703,5.358 10.703,3.697 10.703,3.098 11.054,2.747 11.536,2.265 12.171,2.265 13.247,2.265 13.462,2.05 ; 15.341,2.265 16.388,2.265 16.923,2.265 17.478,2.82 17.478,5.233 17.353,5.358 ; 16.683,9.658 16.558,9.783 16.558,12.196 17.112,12.751 17.648,12.751 18.695,12.751 ; 20.574,12.954 20.777,12.751 21.864,12.751 22.5,12.751 22.982,12.269 23.333,11.918 23.333,11.403 23.333,9.658 ; 22.565,5.358 22.565,3.697 22.565,3.098 22.916,2.747 23.397,2.265 24.033,2.265 25.109,2.265 25.324,2.05 ; 27.202,2.265 28.25,2.265 28.785,2.265 29.339,2.82 29.339,5.233 29.215,5.358 ; 28.627,9.813 28.502,9.938 28.502,12.351 29.057,12.906 29.592,12.906 30.639,12.906 ; 32.518,13.109 32.721,12.906 33.808,12.906 34.444,12.906 34.926,12.424 35.277,12.073 35.277,11.558 35.277,9.813 ; 34.649,5.45 34.649,3.79 34.649,3.19 35,2.839 35.482,2.358 36.118,2.358 37.193,2.358 37.408,2.143 ; 39.287,2.358 40.334,2.358 40.869,2.358 41.424,2.912 41.424,5.325 41.299,5.45 ; 40.615,9.774 40.491,9.899 40.491,12.312 41.045,12.867 41.58,12.867 42.628,12.867 ; 44.507,13.07 44.71,12.867 45.797,12.867 46.433,12.867 46.914,12.385 47.265,12.034 47.265,11.519 47.265,9.774 ; 46.695,5.45 46.695,3.79 46.695,3.19 47.046,2.839 47.527,2.358 48.163,2.358 49.239,2.358 49.454,2.143 ; 51.332,2.358 52.38,2.358 52.915,2.358 53.469,2.912 53.469,5.325 53.345,5.45
  other v2: 19.933,4.9 43.866,5.016 31.902,5.055 83.918,5.247 95.891,5.29 107.931,5.284 13.925,9.881 25.787,9.881 37.871,9.974 49.917,9.974 89.882,10.058 113.875,10.093 77.902,10.109 101.905,10.107 54.864,15.257 73.121,15.392 2.515,15.57 54.985,38.472 2.388,38.557 73.05,38.659 90.125,44.019 49.981,44.15 13.97,44.171 38.018,44.171 78.035,44.171 101.956,44.196 113.976,44.222 25.883,44.28 84.099,48.793 95.907,48.8 108.072,48.793 32.08,48.87 43.968,48.929 20.041,49.098
  other v3: 11,9.5 53,9.5 74.975,9.5 72,12.5 4,18.5 55.982,18.5 72.05,35.5 4,41.5 11.05,44.5 53.05,44.5 75.025,44.5 117.025,44.5
  other v4: 6,6.75 58,6.75 70,6.75 122,6.75 6,47.25 58,47.25 70,47.25 122,47.25

## Polygon pours and split planes (outlines as drawn)
GND on Top Layer "GND_L01_P075" (solid, pour order 75): 117.425,29.329 117.425,23.469 117.796,23.098 117.796,22.2 121.1,22.2 124.142,25.242 125.37,25.242 125.428,25.3 125.428,29.387 125.371,29.329
GND on Top Layer "GND_L01_P065" (solid, pour order 65): 108.839,16.528 108.839,17.416 108.552,17.704 107.264,17.704 107.264,23.564 114.928,23.564 115.075,23.564 115.075,19.625 113.281,17.831 111.049,17.831 109.703,16.485 109.66,16.528
GND on Top Layer "GND_L01_P139" (solid, pour order 139): 71.48,30.625 70.296,30.625 70.271,30.601 70.271,28.925 67.621,28.925 67.621,30.093 69.046,31.518 69.046,33.68 70.025,33.68 70.025,32.252 70.902,31.375 71.48,31.375
GND on Top Layer "GND_L01_P141" (solid, pour order 141): 65.223,31.852 65.2,31.875 65.2,32.966 65.817,32.966 66.931,31.852 67.254,31.852 67.375,31.731 67.375,29.625 67.349,29.599 66.069,28.321 64.973,28.321 64.973,27.392 59,27.392 59,31.852
GND on Top Layer "GND_L01_P067" (solid, pour order 67): 108.352,31.694 108.552,31.494 108.552,29.769 109.316,29.769 113.014,33.467 113.995,33.467 114.053,33.525 114.053,37.612 113.996,37.554 106.332,37.554 106.332,31.694
GND on Top Layer "GND_L01_P063" (solid, pour order 63): 52.629,19.815 50.924,18.11 47.574,18.11 47.574,17.678 46.703,16.807 45.923,16.807 45.923,16.916 44.806,18.034 44.907,18.136 44.907,23.844 52.571,23.844 52.629,23.901
GND on Top Layer "GND_L01_P073" (solid, pour order 73): 44.298,31.979 44.61,31.979 44.755,31.834 44.755,31.217 45.085,31.217 45.584,30.718 45.584,29.913 46.322,29.913 46.965,30.556 46.965,31.217 50.315,31.217 52.019,32.921 52.019,37.008 51.962,36.95 44.298,36.95
GND on Bottom Layer "GND_L04_P079" (solid, pour order 79): 117.892,24.252 117.016,24.252 117.016,23.471 116.3,23.479 116.3,22.257 113.958,22.257 109.159,27.056 109.159,29.322 117.892,29.322
GND on Bottom Layer "GND_L04_P049" (solid, pour order 49): 32.598,37.567 32.89,37.859 42.227,37.859 42.85,37.363 42.85,36.458 42.91,36.398 40.205,36.398 40.246,36.357 40.246,35.014 39.726,34.493 39.726,31.883 39.338,31.496 31.956,31.496 31.572,31.88 31.572,35.135 32.598,36.161
GND on Bottom Layer "GND_L04_P061" (solid, pour order 61): 96.302,24.282 96.594,24.575 105.932,24.575 106.554,24.079 106.554,23.174 106.614,23.114 103.909,23.114 103.951,23.073 103.951,21.73 103.43,21.209 103.43,18.599 103.043,18.212 95.66,18.212 95.276,18.596 95.276,21.851 96.302,22.877
GND on Bottom Layer "GND_L04_P055" (solid, pour order 55): 95.615,38.049 95.907,38.341 105.245,38.341 105.867,37.846 105.867,36.941 105.927,36.881 103.223,36.881 103.264,36.84 103.264,35.496 102.743,34.976 102.743,32.366 102.356,31.979 94.973,31.979 94.59,32.362 94.59,35.618 95.615,36.643
GND on Bottom Layer "GND_L04_P051" (solid, pour order 51): 76.433,37.023 77.309,37.023 77.269,37.063 77.269,37.722 79.47,37.698 79.47,39.018 80.367,39.018 85.166,34.219 85.166,31.953 76.433,31.953
GND on Bottom Layer "GND_L04_P085" (solid, pour order 85): 76.15,29.65 76.15,29.075 75.625,28.55 71.175,28.55 68.45,31.276 68.45,32.225 70.75,32.225 73.3,29.975 73.3,29.35 74.706,29.35 74.706,29.65
GND on Bottom Layer "GND_L04_P045" (solid, pour order 45): 42.799,24.74 36.231,24.74 35.647,25.324 34.869,25.324 34.869,24.742 32.233,22.105 32.233,18.85 32.616,18.466 39.999,18.466 40.386,18.853 40.386,21.463 40.907,21.984 40.907,23.327 40.866,23.368 43.57,23.368 43.51,23.428 43.51,24.174
GND on Bottom Layer "GND_L04_P043" (solid, pour order 43): 13.797,35.956 14.672,35.956 14.633,35.996 14.633,36.655 16.833,36.631 16.833,37.951 17.731,37.951 22.529,33.152 22.529,30.886 13.797,30.886
GND on Bottom Layer "GND_L04_P033" (solid, pour order 33): 13.081,20.931 13.956,20.931 13.917,20.97 13.917,21.63 16.117,21.605 16.117,22.925 17.015,22.925 21.813,18.126 21.813,15.748 13.081,15.748
GND on Bottom Layer "GND_L04_P151" (solid, pour order 151): 48.625,28.4 51,28.4 51.25,28.15 51.25,27.625 51.25,27.575 52,27.575 52,28.15 52.25,28.4 54.7,28.4 54.726,28.426 54.7,28.425 54.7,29.2 49.6,29.2 49.6,30.644 49.606,30.65 48.625,30.65 48.613,30.625 48.613,29.212 48.625,29.2
3V on Bottom Layer "3V_L04_P097" (solid, pour order 97): 48.649,27.775 48.674,27.8 50.75,27.8 50.9,27.65 50.9,25.9 48.649,25.9 48.649,27.749 48.675,27.775
3V3 on Bottom Layer "3V3_L04_P095" (solid, pour order 95): 54.675,27.775 52.475,27.775 51.175,26.475 51.175,26 54.675,26
GND on Bottom Layer "GND_L04_P057" (solid, pour order 57): 76.463,20.849 77.338,20.849 77.299,20.889 77.299,21.548 79.499,21.524 79.499,22.844 80.397,22.844 85.195,18.045 85.195,15.779 76.463,15.779
GND on Bottom Layer "GND_L04_P071" (solid, pour order 71): 120.701,34.03 120.681,34.011 118.974,34.011 118.974,32.639 118.626,32.292 116.205,32.292 116.205,30.759 116.18,30.734 116.332,30.582 119.126,30.582 119.151,30.556 119.177,30.582 120.117,30.582 120.117,31.471 120.447,31.801 120.447,32.461 120.472,32.487 120.472,33.401 120.612,33.401 120.701,33.49 120.675,33.515 120.675,33.985
GND on Bottom Layer "GND_L04_P059" (solid, pour order 59): 89.693,16.654 88.163,18.183 88.163,18.466 88.163,18.98 90.548,20.957 91.259,21.667 92.44,21.664 92.849,22.073 93.608,22.073 93.608,20.394 92.012,20.394 91.386,19.768 91.386,17.298 91.575,17.109 91.575,16.039 90.307,16.039
GND on Bottom Layer "GND_L04_P053" (solid, pour order 53): 93.294,36.017 92.357,36.017 91.797,35.457 90.616,35.461 90.168,35.012 87.96,33.182 87.96,32.061 90.017,30.004 90.878,30.004 90.878,31.347 90.773,31.452 90.773,33.59 91.632,34.449 93.294,34.449
GND on Bottom Layer "GND_L04_P047" (solid, pour order 47): 30.277,35.484 29.34,35.484 28.78,34.924 27.599,34.927 27.15,34.479 24.943,32.649 24.943,30.198 26.295,30.176 27,29.471 27.861,29.471 27.861,30.813 27.755,30.919 27.755,33.057 28.614,33.916 30.277,33.916
GND on Bottom Layer "GND_L04_P035" (solid, pour order 35): 30.743,22.352 29.829,22.352 29.575,22.098 28.394,22.101 27.683,21.391 25.298,19.414 25.298,17.113 26.828,17.088 27.442,16.473 28.71,16.473 28.71,17.543 28.521,17.732 28.521,20.202 29.147,20.828 30.743,20.828
3V on VCC "3V_L03_P147" (solid, pour order 147): 0,0 80,0 80,-0.042 128.09,-0.042 128.09,53.958 48.133,53.958 48.09,54 0,54
3V3 on VCC "3V3_L03_P143" (solid, pour order 143): 61.375,21 61.375,25.55 71.337,25.55 71.337,27.45 64.925,27.45 64.925,32.2 63.95,32.2 63.95,26.958 51.825,26.958 51.825,25.975 56.95,25.975 56.95,21
GND on GND "GND_L02_P133" (solid, pour order 133): 73.75,0 128,0 128.075,0.075 128.075,54 0,54 0,0 54.25,0 54.325,0.075 54.325,0.092 73.75,0.092

## Keep-outs
GND:
  rectangle: 99.225,18.192 100,18.971
  rectangle: 98.35,31.95 99.1,32.725
  rectangle: 36.125,18.475 36.861,19.225
  rectangle: 35.325,31.494 36.05,32.175

## Other copper
GND:
  pour cut-out: 54.325,34.112 73.75,34.112 73.75,34.782 54.325,34.782
  pour cut-out: 54.325,19.25 73.75,19.25 73.75,19.886 54.325,19.886
VCC:
  pour cut-out: 48.09,53.741

## Silkscreen, mask and mechanical layers (free items; w line width, h text height)
Top Overlay:
  circle w0.254: c58.9,31.075 r0.032
  lines w0.2: 10,12.825 10.05,12.875 ; 17,2.5 17,12.5 ; 17,41.5 17,51.5 ; 23,2.5 23,12.5 ; 23,41.5 23,51.5 ; 29,2.5 29,12.5 ; 29,41.5 29,51.5 ; 35,2.683 35,12.5 ; 35,41.5 35,51.5 ; 41,2.5 41,12.5 ; 41,41.5 41,51.5 ; 47,2.5 47,12.5 ; 47,41.5 47,51.5 ; 74.925,12.5 75,2.5 117,2.5 117,12.5 75,12.5 ; 78.1,28.941 78.1,34.802 52.982,34.802 52.982,31.232 50.925,31.232 50.925,25.277 50.977,25.225 52.575,25.225 78.1,25.225 78.1,31.155 ; 80.925,2.5 80.925,12.5 ; 81,41.45 81,51.45 ; 86.925,2.5 86.925,12.5 ; 87,41.45 87,51.45 ; 92.925,2.5 92.925,12.5 ; 93,41.45 93,51.45 ; 98.925,2.5 98.925,12.5 ; 99,41.633 99,51.45 ; 104.925,2.5 104.925,12.5 ; 105,41.45 105,51.45 ; 110.925,2.5 110.925,12.5 ; 111,41.45 111,51.45 ; 11,12.5 11,2.5 53,2.5 53,12.5 11,12.5 ; 11,12.5 1,12.5 1,18.5 11,18.5 11,12.5 ; 11,41.5 11,35.5 1,35.5 1,41.5 11,41.5 ; 11,41.5 11,51.5 53,51.5 53,41.5 11,41.5 ; 75,12.5 75,18.5 65,18.5 65,12.5 75,12.5 ; 10.05,18.725 10.05,18.725 ; 52.982,12.5 62.982,12.5 62.982,18.5 52.982,18.5 52.982,12.5 ; 52.982,35.554 62.982,35.554 62.982,41.554 52.982,41.554 52.982,35.554 ; 65.05,35.5 75.05,35.5 75.05,41.5 65.05,41.5 65.05,35.5 ; 75,41.5 75,51.5 117,51.5 117,41.5 75,41.5
  text "A3-1" at 57,42 h0.75
  text "A3-4" at 68.504,42 h0.75
  text "A2-1" at 12.5,40 h0.75
  text "A2-2" at 18.547,40 h0.75
  text "A2-3" at 24.594,40 h0.75
  text "A2-6" at 30.641,40 h0.75
  text "A2-8" at 36.688,40 h0.75
  text "A2-5" at 42.735,40 h0.75
  text "A2-7" at 48.782,40 h0.75
  text "A3-2" at 76.95,40 h0.75
  text "A3-3" at 82.887,40 h0.75
  text "A3-6" at 88.825,40 h0.75
  text "A3-8" at 94.762,40 h0.75
  text "A3-7" at 100.7,40 h0.75
  text "A3-5" at 106.637,40 h0.75
  text "A5-1" at 112.575,40 h0.75
  text "1Mx TEST SMA" at 126.75,35.081 h0.75 r90
  text "A2-4" at 5,34 h0.75
  text "ADC" at 63.5,24.105 h0.75
  text "HERON MK II / PAY-OPTICAL V2" at 10.725,23.012 h0.75
  text "!" at 2.388,20.65 h15
  text "A1-3" at 5,19 h0.75
  text "A1-2" at 12.75,13 h0.75
  text "A1-1" at 18.738,13 h0.75
  text "A1-4" at 24.725,13 h0.75
  text "A1-6" at 30.712,13 h0.75
  text "A1-8" at 36.7,13 h0.75
  text "A1-7" at 42.687,13 h0.75
  text "A1-5" at 48.675,13 h0.75
  text "A4-1" at 76.832,13 h0.75
  text "A4-4" at 82.832,13 h0.75
  text "A4-6" at 88.507,13 h0.75
  text "A4-8" at 94.757,13 h0.75
  text "A4-7" at 100.332,13 h0.75
  text "A4-5" at 106.807,13 h0.75
  text "A5-2" at 112.457,13 h0.75
  text "1x TEST SMA" at 127,11.78 h0.75 r90
  text "A4-2" at 56.764,11 h0.75
  text "A4-3" at 68.5,11 h0.75
Bottom Overlay:
  circle w0.2: c6.519,22.633 r1.172
  lines w0.2: 4.239,27.048 4.239,24.201 8.739,24.201 8.739,27.104 4.315,27.104 ; 4.334,21.721 4.334,22.506 5.038,22.506 5.038,21.691 4.364,21.691 ; 8.019,22.698 8.019,23.482 8.724,23.482 8.724,22.668 8.049,22.668 ; 1,20.5 12,20.5 12,32.385 1,32.385 1,20.5 ; 1.454,27.43 1.454,29.855 2.813,29.855 2.813,27.43 1.454,27.43 ; 2.852,24.917 3.75,24.917 3.75,26.238 2.852,26.238 2.852,24.917 ; 3.204,27.43 3.204,29.855 4.563,29.855 4.563,27.43 3.204,27.43 ; 5.25,27.43 5.25,29.855 7.75,29.855 7.75,27.43 5.25,27.43 ; 8.443,27.408 8.443,29.833 9.801,29.833 9.801,27.408 8.443,27.408 ; 9.25,24.917 10.193,24.917 10.193,26.238 9.25,26.238 9.25,24.917 ; 10.157,27.408 11.515,27.408 11.515,29.833 10.157,29.833 10.157,27.408 ; 48.354,26.39 55.909,26.39 55.909,30.813 55.836,30.886 48.354,30.886 48.354,26.39 ; 56.181,19.911 56.25,19.842 72.068,19.842 72.25,19.66 72.25,28.232 56.181,28.232 56.181,19.911 ; 68,28.499 68.144,28.355 78.892,28.355 78.892,30.813 78.819,30.886 76,30.886 76,34.339 68.024,34.339 68,34.315 68,28.499
  text "DAC" at 75.87,34.7 h0.75
  text "3V" at 55.75,31.25 h0.75
  text "AMP REF LAYOUT" at 11.617,30.678 h0.75
  text "INCOMING" at 66.5,28.321 h0.75